# Allegro board RAK833_RPIGATEWAY.brd
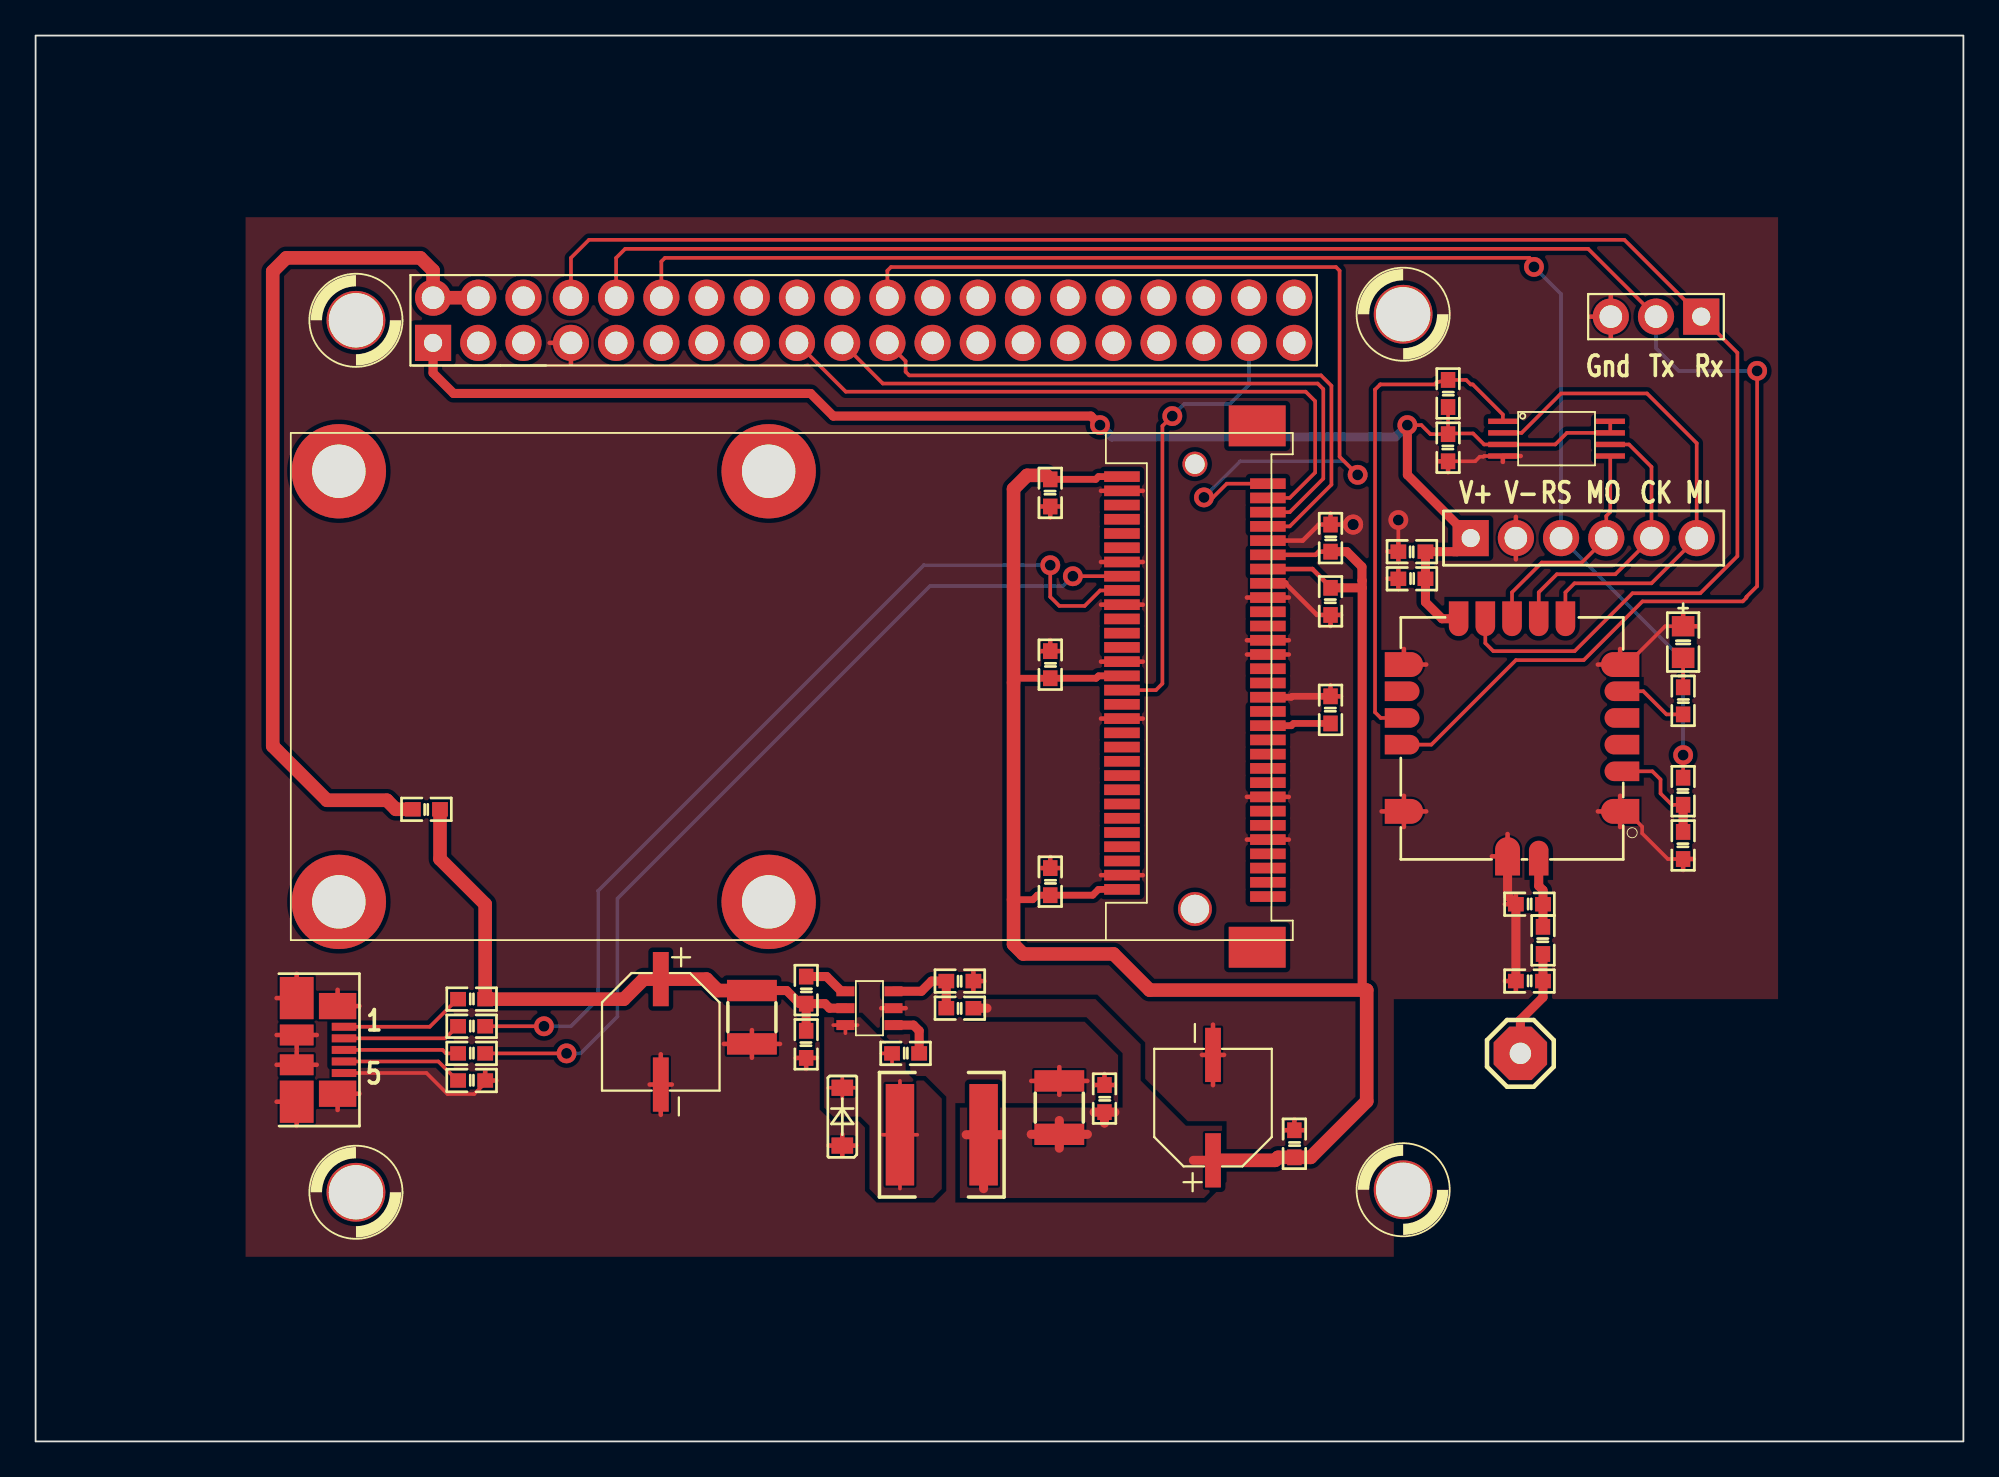
[diagram p0: board, top side]
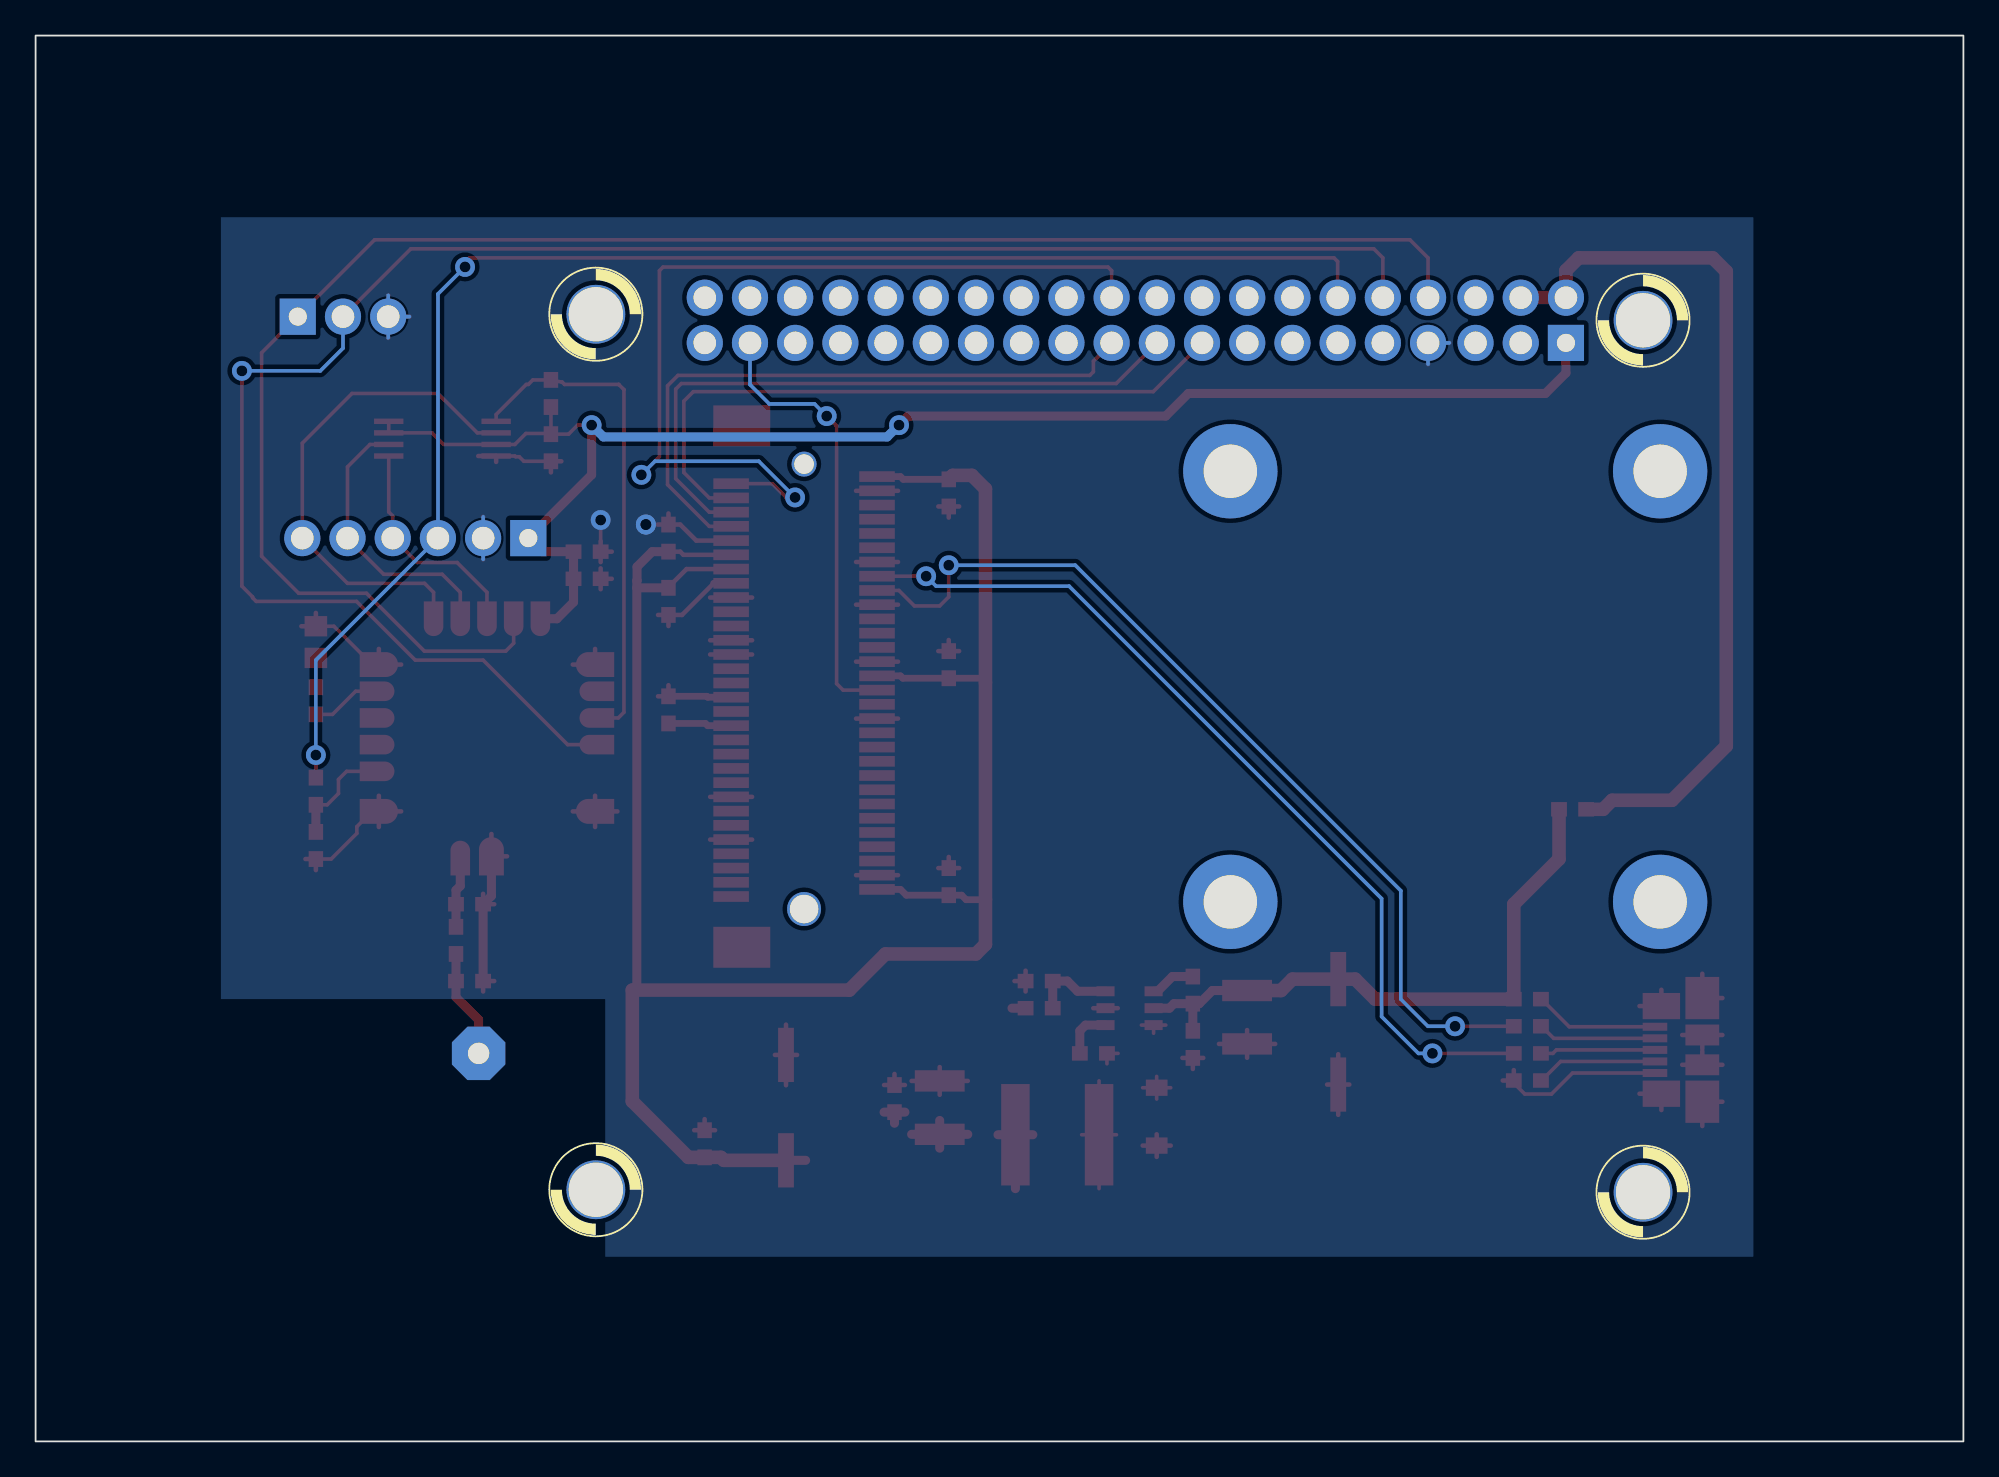
[diagram p1: board, bottom side, seen from below]

Outline 108.32 x 79 mm; copper layers: TOP, BOTTOM. Coordinates in mm from the lower left corner of the outline.
Outline path: rectangle 0,0 108.32,79

## Design rules (mm)
constraint set DEFAULT: min track width 0.203

## Placement (name value [footprint] x y rotation side)
C1  10nF  [C0603]  48.88 21.8 180 top
C2  100uF/35V  [CAP_AL_D]  35.13 23.02 270 top
C3  100nF  [C0603]  43.3 22.31 270 top
C4  10u/35V  [CAP_1210]  40.25 23.84 270 top
C5  22u/6.3V  [CAP_1210]  57.52 18.76 90 top
C6  220u/16V  [CAP_AL_D]  66.16 18.76 90 top
C7  100nF  [C0603]  60.06 19.26 90 top
C8  10u/35V  [C0603]  57.01 53.3 270 top
C9  10u/35V  [C0603]  57.01 43.65 90 top
C10  10u/35V  [C0603]  57.01 31.46 90 top
C11  10u/35V  [C0603]  72.76 47.2 270 top
C12  10u/35V  [C0603]  72.76 50.76 90 top
C13  10u/35V  [C0603]  70.73 16.72 90 top
C14  0.1uF  [C0603]  77.33 50 0 top
C15  10uF  [C0603]  77.33 48.47 180 top
C16  0.1uF  [C0603]  92.57 33.49 270 top
C17  10pF  [C0603]  83.94 30.19 180 top
C18  6pF  [C0603]  83.94 25.87 180 top
C19  0.1uF  [C0603]  79.36 55.84 270 top
D1  1N5819  [SOD123]  45.33 18.25 270 top
D2  LED  [LED0805]  92.57 44.92 270 top
E1  ANTENNA  [HEADER_1_3MM]  83.43 21.8 0 top
J1  HEADER 20X2  [HEADER40X2PITCH100MIL]  25 63 90 top
J2  HUM011D-5-S  [CON5_MICROUSB_SKT_SM]  16 22 0 top
J3  ZW_JTAG  [HEADER-6]  86.98 50.76 90 top
J14  Z_DBG  [HEADER3PITCH100MIL]  91.05 63.21 180 top
L1  8.8uH/1.7A  [IND_6X6MM]  50.92 17.23 0 top
L2  8.2nH  [C0603]  84.7 28.15 270 top
MH1  HOLE 4mm  [MH_3MM_1]  18 63 0 top
MH2  HOLE 4mm  [MH_3MM_1]  18 14 0 top
MH3  HOLE 4mm  [MH_3MM_1]  76.84 14.14 0 top
MH4  HOLE 4mm  [MH_3MM_1]  76.84 63.34 0 top
R1  10K  [R0603]  43.3 25.36 90 top
R2  30K  [R0603]  51.93 24.34 0 top
R3  10K  [R0603]  51.93 25.87 0 top
R4  0R/NC  [R0603]  21.96 35.52 0 top
R5  1R  [R0603]  72.76 41.11 270 top
R6  0R/NC  [R0603]  24.5 24.85 180 top
R7  22R  [R0603]  24.5 23.33 180 top
R8  22R  [R0603]  24.5 21.8 180 top
R9  0R/NC  [R0603]  24.5 20.28 180 top
R10  22  [R0603]  92.57 36.54 270 top
R11  360  [R0603]  92.57 41.62 90 top
R12  10K  [R0603]  79.36 58.89 90 top
U1  AP3211  [SOT23-6]  46.85 24.34 180 top
U2  RAK_PCIE  [CONN_PCIE_52POS]  65.14 38.57 90 top
U3  ZM5202  [ZM5202_A]  75.81 47.2 270 top
U4  CAT25256  [TSSOP-8]  85.46 56.35 0 top

## Library data of the parts
C1 C8-C14 C16 C19 = CAP NP
C2 C6 C15 = CAP
C3 C7 = Cap 0603
C4 C5 = CAP NP: User Part Number: PartNr
C17 = C-10pF/50V-SMD0805
C18 = C-6pF/50V-SMD0805
D1 = SS34_2
D2 = LED
E1 = ANTENNA_0
J1 = HEADER 20X2
J2 = USB MIN_6
J3 = HEADER 6
J14 = HEADER 3
L1 = INDUCTOR
L2 = L-8.2nH-SMD0805
MH1-MH4 = MOUNTING HOLE
R1-R3 R5 R10-R12 = RES-SM0402_0
R4 R6-R9 = RESISTOR
U1 = PMIC_SOT23-6
U2 = RAK_PCIE
U3 = ZM5202
U4 = CAT25C02_0

## Footprints (pads in the part's own frame, mm; a bottom-side part is the same pattern mirrored in y, then rotated)
C0603
  rect 0.889x0.813 smd: 1(-0.762,0) 2(0.762,0)
CAP_1210
  rect 1.2x2.8 smd: 1(-1.5,0) 2(1.5,0)
CAP_AL_D
  rect 3.048x0.889 smd: 1(-2.962,0) 2(2.962,0)
CON5_MICROUSB_SKT_SM
  rect 1.38x0.45 smd: 1(1.33,1.3) 2(1.33,0.65) 3(1.33,0) 4(1.33,-0.65) 5(1.33,-1.3)
  rect 1.9x1.175 smd: 6(-1.33,0.837) 11(-1.33,-0.837)
  rect 1.9x2.375 smd: 7(-1.33,2.913) 10(-1.33,-2.913)
  rect 2.1x1.475 smd: 8(0.97,2.463) 9(0.97,-2.463)
CONN_PCIE_52POS
  rect 2.301x3.2 smd: (-10.8,-3.5) (18.499,-3.5)
  round 1.905 hole 1.6 unplated: (-8.651,0)
  round 5.301 hole 3: (-8.25,48.1) (-8.25,23.95) (15.949,48.1) (15.949,23.95)
  round 1.405 hole 1.1 unplated: (16.35,0)
  rect 0.599x1.999 smd: 1(-7.95,-4.1) 2(-7.549,4.1) 3(-7.15,-4.1) 4(-6.749,4.1) 5(-6.35,-4.1) 6(-5.951,4.1) 7(-5.55,-4.1) 8(-5.151,4.1) 9(-4.75,-4.1) 10(-4.351,4.1) 11(-3.95,-4.1) 12(-3.551,4.1) 13(-3.15,-4.1) 14(-2.751,4.1) 15(-2.349,-4.1) 16(-1.951,4.1) 17(1.651,-4.1) 18(2.05,4.1) 19(2.451,-4.1) 20(2.85,4.1) 21(3.251,-4.1) 22(3.65,4.1) 23(4.051,-4.1) 24(4.45,4.1) 25(4.851,-4.1) 26(5.25,4.1) 27(5.652,-4.1) 28(6.05,4.1) 29(6.452,-4.1) 30(6.85,4.1) 31(7.252,-4.1) 32(7.651,4.1) 33(8.052,-4.1) 34(8.451,4.1) 35(8.852,-4.1) 36(9.251,4.1) 37(9.652,-4.1) 38(10.051,4.1) 39(10.452,-4.1) 40(10.851,4.1) 41(11.252,-4.1) 42(11.651,4.1) 43(12.052,-4.1) 44(12.451,4.1) 45(12.852,-4.1) 46(13.251,4.1) 47(13.65,-4.1) 48(14.049,4.1) 49(14.45,-4.1) 50(14.849,4.1) 51(15.25,-4.1) 52(15.649,4.1) A1(-1.549,-4.1) A2(-1.151,4.1) A3(-0.749,-4.1) A4(-0.35,4.1) A5(0.051,-4.1) A6(0.45,4.1) A7(0.851,-4.1) A8(1.25,4.1)
HEADER3PITCH100MIL
  rect 2.032x2.032 hole 1.016: 1(-2.54,0)
  round 2.032 hole 1.27: 2(0,0) 3(2.54,0)
HEADER40X2PITCH100MIL
  rect 2.032x2.032 hole 1.016: 1(-1.27,2.667)
  round 2.032 hole 1.27: 2(1.27,2.667) 3(-1.27,0.127) 4(1.27,0.127) 5(-1.27,-2.413) 6(1.27,-2.413) 7(-1.27,-5.08) 8(1.27,-5.08) 9(-1.27,-7.62) 10(1.27,-7.62) 11(-1.27,-10.16) 12(1.27,-10.16) 13(-1.27,-12.7) 14(1.27,-12.7) 15(-1.27,-15.24) 16(1.27,-15.24) 17(-1.27,-17.78) 18(1.27,-17.78) 19(-1.27,-20.32) 20(1.27,-20.32) 21(-1.27,-22.86) 22(1.27,-22.86) 23(-1.27,-25.4) 24(1.27,-25.4) 25(-1.27,-27.94) 26(1.27,-27.94) 27(-1.27,-30.48) 28(1.27,-30.48) 29(-1.27,-33.02) 30(1.27,-33.02) 31(-1.27,-35.56) 32(1.27,-35.56) 33(-1.27,-38.1) 34(1.27,-38.1) 35(-1.27,-40.64) 36(1.27,-40.64) 37(-1.27,-43.18) 38(1.27,-43.18) 39(-1.27,-45.72) 40(1.27,-45.72)
HEADER-6
  rect 2.032x2.032 hole 1.016: 1(0,6.35)
  round 2.032 hole 1.27: 2(0,3.81) 3(0,1.27) 4(0,-1.27) 5(0,-3.81) 6(0,-6.35)
HEADER_1_3MM
  rrect 3x3 hole 1.2: 1(0,0)
IND_6X6MM
  rect 1.6x5.7 smd: 1(-2.35,0) 2(2.35,0)
LED0805
  rect 1.143x1.27 smd: 1(-0.889,0) 2(0.889,0)
MH_3MM_1
  round 3.302 hole 3.048: 1(0,0)
R0603
  rect 0.889x0.813 smd: 1(-0.762,0) 2(0.762,0)
SOD123
  rect 0.914x1.219 smd: 1(1.626,0) 2(-1.626,0)
SOT23-6
  rect 1.016x0.559 smd: 1(-1.35,0.95) 2(-1.35,0) 3(-1.35,-0.95) 4(1.35,-0.95) 5(1.35,0) 6(1.35,0.95)
TSSOP-8
  rect 1.651x0.305 smd: 1(-3.017,0.975) 2(-3.017,0.325) 3(-3.017,-0.325) 4(-3.017,-0.975) 5(3.017,-0.975) 6(3.017,-0.325) 7(3.017,0.325) 8(3.017,0.975)
ZM5202_A
  custom 1.4x2.15 smd: 1(11.8,13.225) 6(3.55,13.225) 12(3.55,1.075) 16(11.8,1.075)
  custom 1.1x1.95 smd: 2(9.55,13.325) 3(8.05,13.325) 4(6.55,13.325) 5(5.05,13.325) 13(5.05,0.975) 14(6.55,0.975) 15(8.05,0.975)
  custom 1.95x1.1 smd: 7(0.975,10.15) 8(0.975,8.65) 9(0.975,7.15) 10(0.975,5.65) 11(0.975,4.15) 18(14.425,8.65)
  custom 2.15x1.4 smd: 17(14.325,6.9)

## Nets
3.3V: C5.1 C6.1 C7.1 C8.1 C9.1 C10.1 C11.1 C12.1 C13.1 L1.2 R2.2 U2.2 U2.24 U2.39 U2.41 U2.52
GND: C2.2 C3.2 C4.2 C5.2 C6.2 C7.2 C8.2 C9.2 C10.2 C11.2 C12.2 C13.2 C14.1 C15.2 C16.2 C17.2 C18.2 C19.2 D1.1 D2.1(CATHODE) J1.7 J2.5 J2.6 J2.7 J2.8 J2.9 J2.10 J2.11 J3.2 J14.3 R3.2 R5.1 R9.1 U1.2 U2.4 U2.9(PIN9) U2.15 U2.18 U2.21 U2.26 U2.27 U2.29 U2.34 U2.35 U2.37 U2.40 U2.43 U2.50 U3.1 U3.6 U3.12 U3.16 U3.17 U4.4
VCC3.3V: C14.2 C15.1 C19.1 J1.1 J3.1 R12.1 U3.11 U4.3(W\P\) U4.7 U4.8
VCC5V: C2.1 C3.1 C4.1 R1.1 R4.2 R6.1 U1.5
ANTEN: C18.1 E1.1 L2.2
EXTERNALGPS: U2.19
LED: R11.1 U3.5
RF: C17.1 L2.1 U3.18
RPI_5V: J1.2 J1.4 R4.1
SPDT_SEL: R5.2 U2.17
SPI_CE: J1.22 U2.51
SPI_CLK: J1.21 U2.45
SPI_MISO: J1.19 U2.47
SPI_MOSI: J1.17 U2.49
SPI_RST: J1.37 U2.22
USB_D+: R8.1 U2.38
USB_D-: R7.1 U2.36
USB_DM: J2.2 R7.2
USB_DP: J2.3 R8.2
ZM_INT0: U3.3
ZM_INT1: U3.4
ZM_RESET: J1.12 J3.3 R10.1
ZM_RX: J1.8 J14.1 U3.10
ZM_TX: J1.10 J14.2 U3.15
ZWAVE_SPI_CS: R12.2 U3.14(ZEROX) U4.1
ZWAVE_SPI_MISO: J3.6 U3.7 U4.2
ZWAVE_SPI_MOSI: J3.4 U3.9 U4.5
ZWAVE_SPI_SCLK: J3.5 U3.8 U4.6
N7996678: C1.1 U1.1
N7996682: C1.2 D1.2(CATHODE) L1.1 U1.6(SW)
N7996842: R1.2 U1.4
N7996854: R2.1 R3.1 U1.3
N7997918: C16.1 R10.2 U3.2
N7999815: J2.1 R6.2
N7999903: J2.4(ID) R9.2
N79981601: D2.2 R11.2

Pads without a net: J1 3 5 6 9 11 13 14 15 16 18 20 23 24 25 26 27 28 29 30 31 32 33 34 35 36 38 39 40; MH1 1; MH2 1; MH3 1; MH4 1; U2 1 3 5 6 7 8 10 11 12 13 14 16 20 23 25 28 30 31 32 33 42 44 46 48 A1 A2 A3 A4 A5 A6 A7 A8; U3 13

## Via types
v1: diameter 1.118, hole 0.61, TOP to BOTTOM, 15 vias

## Routing (per net, layer and track width the routed paths; a pad name or vN(x,y) marks a point on that pad's centre or on a via; arc(x,y) is an arc through that point)
3.3V: length 130.6
  TOP w0.254: U2.39 71.74,49.02 72.76,48 C11.1 ; U2.41 71.92,49.82 72.1,50 C12.1
  TOP w0.381: U2.24 59.72,43.02 59.59,42.89 C9.1 55.2,42.89 54.95,42.63 ; 54.95,30.44 56.03,30.44 56.29,30.69 C10.1 59.4,30.69 59.72,31.02 U2.2 ; U2.52 59.72,54.22 59.57,54.06 C8.1
  TOP w0.508: 53.27,14.2 L1.2 ; L1.2 54.24,17.23 ; L1.2 52.29,17.23 ; 55.94,17.26 C5.1 ; C5.1 57.52,18.03 ; C5.1 59.1,17.26 ; C5.1 57.52,16.48 ; 74.54,47.97 74.54,25.61 74.79,25.36 ; 74.54,47.97 74.54,48.37 74.53,48.38 74.53,49.15 73.67,50 C12.1 ; 74.54,47.97 C11.1 ; R2.2 53.46,24.34 ; 59.48,18.5 C7.1 ; C7.1 60.64,18.5 ; C7.1 60.06,17.88 ; C6.1 65.05,15.79
  TOP w0.762: C6.1 69.65,15.79 69.81,15.96 C13.1 71.64,15.96 74.79,19.11 74.79,25.36 62.6,25.36 60.57,27.39 55.49,27.39 54.95,27.93 54.95,53.52 55.71,54.29 56.79,54.29 C8.1
GND: length 165.3
  TOP w0.203: 73.34,51.52 v1(74.03,51.52) ; D2.1 91.56,45.81 89.41,43.65 U3.6 ; U3.1 89.41,35.4 90.27,34.54 90.27,34.17 91.71,32.73 C16.2 ; C19.2 80.89,55.08 81.14,55.33 81.35,55.33 81.39,55.37 U4.4 ; R9.1 25.26,20.14 24.64,19.52 23.15,19.52 21.96,20.7 J2.5 ; 76.57,50.58 v1(76.57,51.78)
  TOP w0.254: 89.03,34.53 U3.1 ; U3.1 87.78,35.4 ; U3.1 89.03,36.28 ; 59.86,31.82 U2.4 62.22,31.82 ; C5.2 57.52,21.03 ; C5.2 59.1,20.26 ; C5.2 55.94,20.26 ; C5.2 57.52,19.48 ; 66.16,20.02 C6.2 ; C6.2 66.78,21.72 ; C6.2 66.16,23.42 ; C6.2 65.53,21.72 ; 42.71,21.55 C3.2 ; C3.2 43.3,20.93 ; C3.2 43.88,21.55 ; 70.42,47.42 U2.35 68.06,47.42 ; 92.57,32.1 C16.2 93.16,32.73 ; 70.22,48.22 72,46.44 C11.2 ; 70.42,36.22 U2.15 68.06,36.22 ; 59.48,20.03 C7.2 ; C7.2 60.06,20.65 ; C7.2 60.64,20.03 ; C15.2 76.57,49.06 ; C15.2 76.57,47.89 ; C15.2 75.95,48.47 ; 56.43,32.22 C10.2 ; C10.2 57.01,32.84 ; C10.2 57.6,32.22 ; 40.25,21.56 C4.2 ; C4.2 41.83,22.34 ; C4.2 38.67,22.34 ; C4.2 40.25,23.11 ; 72.76,45.82 C11.2 ; C11.2 73.34,46.44 ; 18.2,24.46 J2.8 16.97,25.38 ; 56.43,44.41 C9.2 ; C9.2 57.01,45.03 ; C9.2 57.6,44.41 ; C12.2 72.1,51.52 71.2,50.62 U2.43 ; C12.2 73.34,51.52 ; C12.2 72.76,52.14 ; 87.31,63.21 J14.3 ; J14.3 88.51,62.01 ; J14.3 88.51,64.4 ; 30.08,60.54 J1.7 28.89,61.73 ; 72.76,42.49 R5.1 73.34,41.87 ; 78.14,43.65 U3.12 76.88,44.53 ; 93.38,45.81 D2.1 92.57,46.56 ; C8.2 57.6,52.54 ; C8.2 57.01,51.92 ; C8.2 56.43,52.54 ; C13.2 70.73,18.11 ; C13.2 70.14,17.49 ; C13.2 71.31,17.49 ; 48.89,24.34 U1.2 47.52,24.34 ; 81.83,32.88 U3.17 82.71,34.13 ; 59.86,43.82 U2.26 62.22,43.82 ; 44.54,16.62 D1.1 ; D1.1 46.12,16.62 ; D1.1 45.33,15.99 ; D1.1 45.33,17.26 ; 59.86,53.42 U2.50 62.22,53.42 ; 68.06,44.22 U2.27 70.42,44.22 ; 79.36,54.46 C19.2 78.78,55.08 ; 18.2,19.54 J2.9 16.97,18.62 ; 76.57,49.41 C14.1 ; C14.1 76.57,50.58 ; C14.1 75.95,50 ; 83.17,30.77 C17.2 82.55,30.19 ; 83.17,49.57 J3.2 83.17,51.95 ; 13.54,21.16 J2.11 ; J2.11 14.67,21.93 ; J2.11 15.8,21.16 ; 68.06,45.02 U2.29 70.42,45.02 ; 59.86,49.42 U2.40 62.22,49.42 ; R3.2 52.69,26.45 ; R3.2 52.69,25.28 ; R3.2 53.32,25.87 ; 13.54,19.09 J2.10 14.67,17.72 ; 14.67,22.07 J2.6 ; J2.6 15.8,22.84 ; J2.6 13.54,22.84 ; U3.16 78.14,35.4 ; U3.16 75.63,35.4 ; U3.16 76.88,34.53 ; U3.16 76.88,36.28 ; 87.78,43.65 U3.6 89.03,44.53 ; 83.17,25.28 C18.2 82.55,25.87 ; 62.22,40.62 U2.18 59.86,40.62 ; 82.44,55.04 U4.4 83.45,55.37 ; C2.2 35.75,20.05 ; C2.2 35.13,21.76 ; C2.2 34.51,20.05 ; C2.2 35.13,18.35 ; 62.22,47.02 U2.34 59.86,47.02 ; 25.88,20.28 R9.1 25.26,20.86 ; 68.06,33.82 U2.9 70.42,33.82 ; 14.67,26.28 J2.7 13.54,24.91
  TOP w0.381: R5.1 70.61,41.87 70.56,41.82 U2.21 ; 70.22,48.22 U2.37
  TOP w0.508: U3.17 82.71,30.65 C17.2 C18.2
  BOTTOM w0.203: 88.51,62.01 J14.3 ; J14.3 88.51,64.4 ; J14.3 87.31,63.21 ; 83.17,51.95 J3.2 83.17,49.57 ; 30.08,60.54 J1.7 28.89,61.73
VCC3.3V: length 88.3
  TOP w0.203: U4.8 U4.7 86.04,56.67 85.39,56.02 U4.3 81.39,56.02 80.77,56.64 79.36,56.64 ; v1(77.08,57.11) 77.87,57.11 78.37,56.6 C19.1 79.36,56.64 ; 79.36,56.64 R12.1
  TOP w0.508: U3.11 79.03,46.23 78.09,47.16 C15.1 C14.2 79.87,50 J3.1 77.08,54.32 v1(77.08,57.11) ; J1.1 22.33,60.04 23.48,58.89 43.55,58.89 44.82,57.62 59.3,57.62 v1(59.81,57.11)
  BOTTOM w0.508: v1(77.08,57.11) 76.41,56.45 60.47,56.45 v1(59.81,57.11)
VCC5V: length 34.6
  TOP w0.508: R1.1 C3.1 ; R1.1 44.36,24.6 44.61,24.34 U1.5 ; R1.1 42.94,24.6 42.2,25.34 C4.1
  TOP w0.762: C4.1 38.34,25.34 37.7,25.98 C2.1 34.18,25.98 33.05,24.85 R6.1 25.26,30.19 22.72,32.73 R4.2
ANTEN: length 6.1
  TOP w0.508: E1.1 83.43,23.69 84.7,24.96 C18.1 L2.2
LED: length 4
  TOP w0.203: U3.5 90.34,42.15 91.64,40.85 R11.1
RF: length 4
  TOP w0.508: L2.1 C17.1 84.7,30.97 84.46,31.21 U3.18
RPI_5V: length 49.7
  TOP w0.762: J1.4 J1.2 22.33,65.79 21.62,66.51 14.09,66.51 13.32,65.75 13.32,39.08 16.37,36.03 19.74,36.03 20.25,35.52 R4.1
SPDT_SEL: length 3.6
  TOP w0.381: U2.17 70.56,40.22 70.68,40.35 R5.2
SPI_CE: length 52.8
  TOP w0.203: J1.22 47.86,65.79 48.06,65.99 73.06,65.99 73.27,65.79 73.27,55.33 v1(74.28,54.32) ; 69.39,53.82 U2.51 66.93,53.82 66.16,53.05 v1(65.65,53.05)
  BOTTOM w0.203: v1(74.28,54.32) 73.52,55.08 67.68,55.08 v1(65.65,53.05)
SPI_CLK: length 36.4
  TOP w0.203: J1.21 48.88,60.71 48.88,60.11 49.09,59.9 72.23,59.9 72.81,59.32 72.81,53.76 70.47,51.42 U2.45
SPI_MISO: length 37
  TOP w0.203: J1.19 47.6,59.45 72.04,59.45 72.35,59.13 72.35,54.1 70.47,52.22 U2.47
SPI_MOSI: length 37.7
  TOP w0.203: U2.49 70.47,53.02 71.9,54.45 71.9,58.46 71.36,58.99 45.52,58.99 J1.17
SPI_RST: length 25.1
  TOP w0.203: U2.22 62.95,42.22 63.31,42.58 63.31,57.06 v1(63.87,57.62)
  BOTTOM w0.203: v1(63.87,57.62) 64.55,58.3 67.09,58.3 68.18,59.39 J1.37
USB_D+: length 50.8
  TOP w0.203: R8.1 v1(29.83,21.8) ; v1(58.28,48.62) U2.38
  BOTTOM w0.203: v1(58.28,48.62) 57.73,48.06 50.25,48.06 32.69,30.5 32.69,23.87 30.62,21.8 v1(29.83,21.8)
USB_D-: length 52.4
  TOP w0.203: v1(57.01,49.24) 57.01,47.46 57.52,46.95 58.94,46.95 59.81,47.82 U2.36 ; R7.1 v1(28.56,23.33)
  BOTTOM w0.203: v1(28.56,23.33) 30.09,23.33 31.61,24.85 31.61,30.95 49.9,49.24 v1(57.01,49.24)
USB_DM: length 6.7
  TOP w0.203: J2.2 23.02,22.65 23.7,23.33 R7.2
USB_DP: length 6.5
  TOP w0.203: R8.2 23.06,21.8 22.87,22 J2.3
ZM_RESET: length 83.7
  TOP w0.203: v1(84.19,66) 84.19,66.25 83.94,66.51 35.36,66.51 35.16,66.31 J1.12 ; R10.1 v1(92.57,38.57)
  BOTTOM w0.203: v1(92.57,38.57) 92.57,43.9 J3.3 85.71,64.48 v1(84.19,66)
ZM_RX: length 100.2
  TOP w0.203: U3.10 81.46,44.86 81.9,44.41 86.48,44.41 89.73,47.66 93.54,47.66 95.62,49.74 95.62,61.17 J14.1 89.27,67.52 31.1,67.52 30.08,66.51 J1.8
ZM_TX: length 106.2
  TOP w0.203: U3.15 78.43,39.15 83.17,43.9 86.98,43.9 90.29,47.2 95.92,47.2 96.13,47.41 96.13,47.46 96.73,48.06 v1(96.73,60.16) ; J1.10 32.62,66.51 33.13,67.02 87.24,67.02 J14.2
  BOTTOM w0.203: J14.2 91.05,61.43 92.32,60.16 v1(96.73,60.16)
ZWAVE_SPI_CS: length 28.4
  TOP w0.203: U4.1 82.44,57.71 80.75,59.4 80.63,59.4 80.38,59.65 R12.2 79.12,59.65 79.06,59.59 78.75,59.53 78.73,59.52 78.72,59.51 78.6,59.4 75.57,59.4 75.55,59.4 75.54,59.38 75.27,59.12 75.26,59.1 75.26,59.09 75.26,40.97 75.58,40.65 U3.14
ZWAVE_SPI_MISO: length 28.4
  TOP w0.203: U3.7 85.96,47.71 86.47,48.22 90.79,48.22 J3.6 93.33,56.09 90.54,58.89 85.71,58.89 83.5,56.67 U4.2
ZWAVE_SPI_MOSI: length 12.7
  TOP w0.203: U3.9 82.96,47.71 84.63,49.39 86.88,49.39 J3.4 88.25,52.01 88.48,52.23 U4.5
ZWAVE_SPI_SCLK: length 15.9
  TOP w0.203: U4.6 89.53,56.02 90.79,54.76 J3.5 88.76,48.73 85.47,48.73 84.46,47.71 U3.8
N7996678: length 2.8
  TOP w0.508: C1.1 49.65,23.07 49.33,23.39 U1.1
N7996682: length 13.9
  TOP w0.203: L1.1 49.54,17.23 ; L1.1 47.59,17.23 ; L1.1 48.57,20.26 ; L1.1 48.57,14.2 ; 45.5,22.94 U1.6 ; U1.6 46.19,23.39 ; U1.6 44.82,23.39 ; 44.54,19.87 D1.2 ; D1.2 46.12,19.87 ; D1.2 45.33,19.24 ; D1.2 45.33,20.51 ; 47.5,21.8 C1.2 48.12,21.22
N7996842: length 2.5
  TOP w0.508: R1.2 44.45,26.12 45.27,25.29 U1.4
N7996854: length 4.7
  TOP w0.508: U1.3 49.77,25.29 50.34,25.87 R3.1 R2.1
N7997918: length 6.2
  TOP w0.203: U3.2 90.84,37.65 91.3,37.2 91.3,36.41 91.94,35.77 R10.2
  TOP w0.508: R10.2 C16.1
N7999815: length 7.1
  TOP w0.203: R6.2 23.7,24.85 22.15,23.3 J2.1
N7999903: length 6.9
  TOP w0.203: R9.2 23.7,20.28 22.63,21.35 J2.4
N79981601: length 1.7
  TOP w0.203: R11.2 D2.2

## Copper pours and planes (outline as drawn; the poured copper is in the pictures)
3.3V on TOP: 52.44,24.85 59.55,24.85 62.09,22.31 62.09,20.28 64.63,17.74 66.66,17.74 66.66,14.69 65.65,13.68 51.93,13.68 51.93,18.76 61.08,18.76 61.08,21.8 59.04,23.84 52.44,23.84
GND on TOP: 11.8,68.79 97.91,68.79 97.91,24.85 76.32,24.85 76.32,10.37 11.8,10.37 ; 32 cut-outs
GND on BOTTOM: 11.8,68.79 11.8,10.37 76.32,10.37 76.32,24.85 97.91,24.85 97.91,68.79 ; 17 cut-outs
N7996682 on TOP: 44.31,23.84 46.34,23.84 47.87,22.31 48.38,22.31 48.88,21.8 48.88,20.79 49.39,20.28 49.9,20.28 50.92,19.26 50.92,14.18 50.41,13.68 47.36,13.68 46.85,14.18 46.85,17.74 46.34,18.25 44.82,18.25 44.31,18.76

## Text on the board
Ref Des/Silkscreen Top: V+ | V- | RS | Gnd | MO | CK | Tx | MI | Rx
